# EAGLE board counter - Copia (EAGLE 9.0.0)
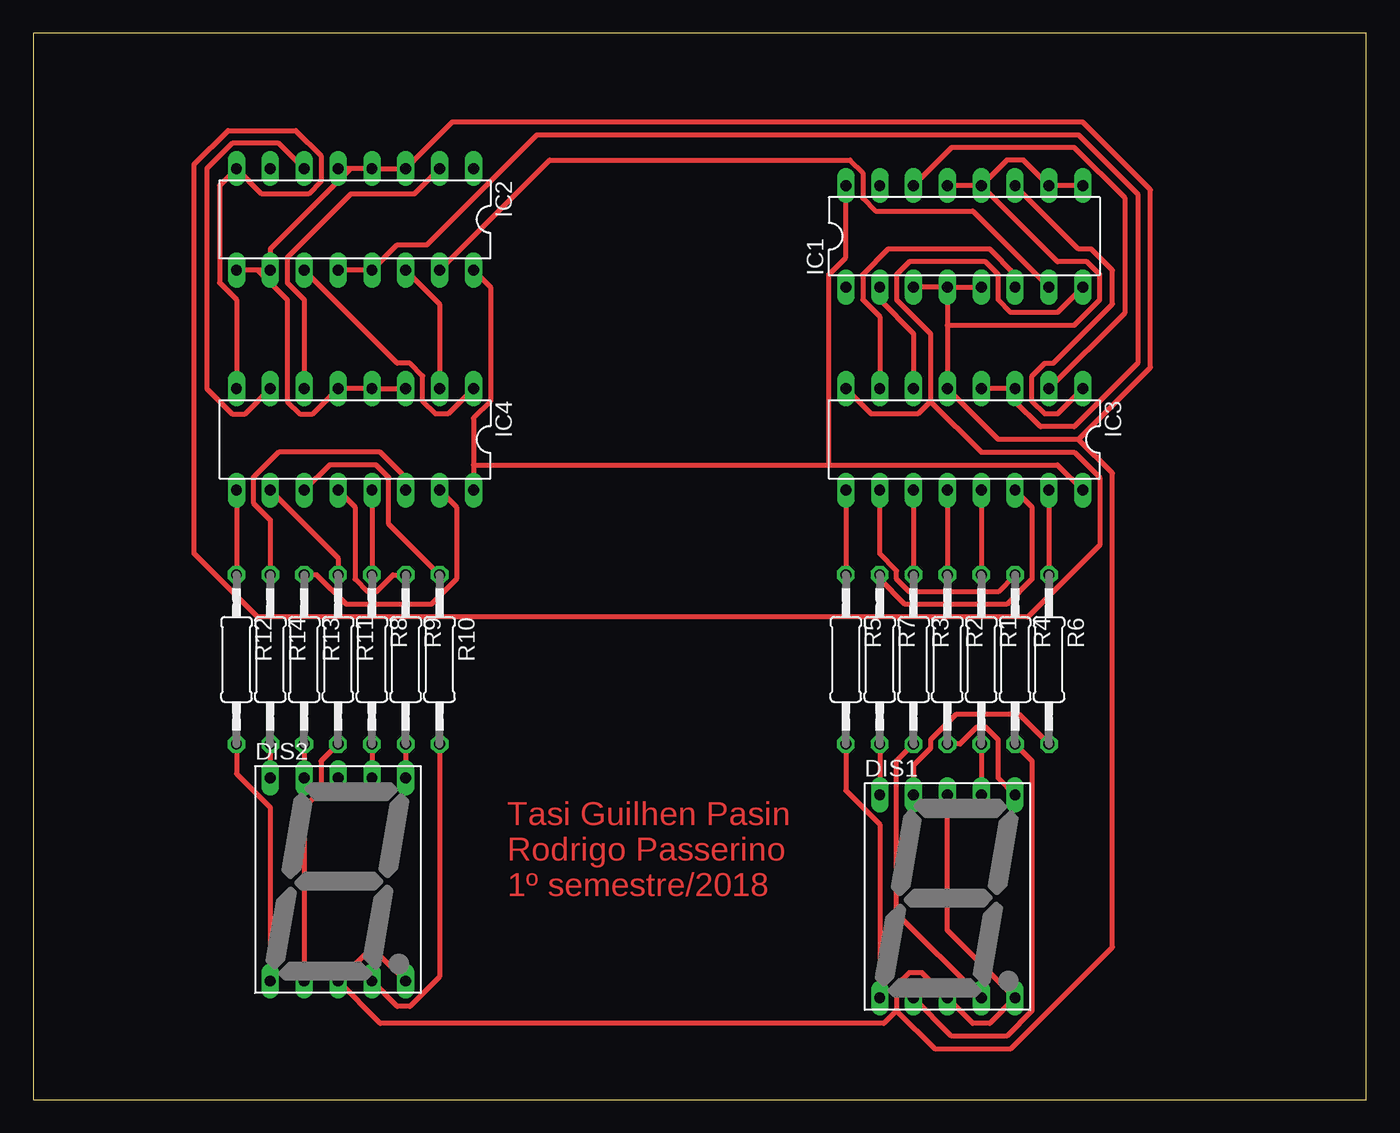
[diagram p0: board, top side]
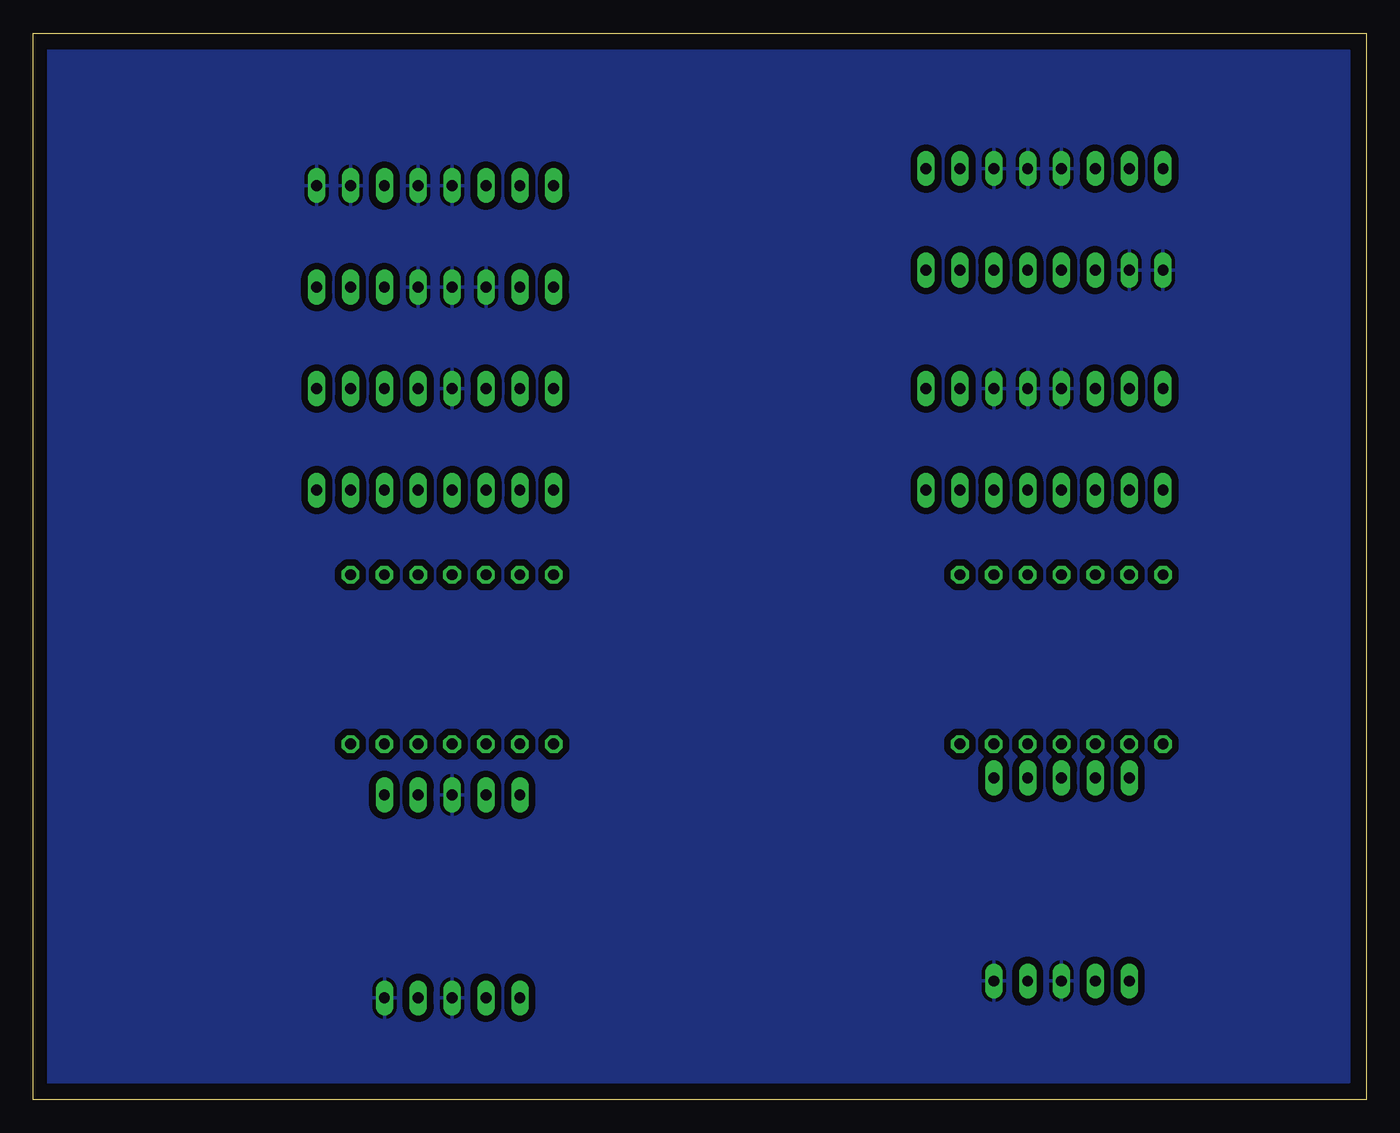
[diagram p1: board, bottom side, seen from below]

Size 100 x 80 mm. Coordinates in mm from the lower left corner, seen from the top.
Outline: 0,0 100,0 100,80 0,80 0,0
Copper layers (1*16): Top 0.035mm / dielectric 1.5mm / Bottom 0.035mm
Design rules "default *": minimum track width 15mil, minimum drill 0.35mm, track to track 20mil, track to pad 6mil, pad to pad 6mil, via to via 6mil, smd to smd 6mil, copper to edge 40mil, drill to drill 6mil, minimum pad ring 10mil, minimum via ring 8mil, stop-mask expansion 4mil, vias tented up to drill 0mil, thermal gap 10mil
Net classes: 0 default: clearance 0.205 mm

## Footprints (pad centres in the part's own frame; a part is rotated, then mirrored left to right if it is on the bottom)
HDSP-M = drill 0.813 long: 1 -5.08,-7.62; 2 -2.54,-7.62; 3 0,-7.62; 4 2.54,-7.62; 5 5.08,-7.62; 6 5.08,7.62; 7 2.54,7.62; 8 0,7.62; 9 -2.54,7.62; 10 -5.08,7.62
DIL16 = drill 0.813 long: 1 -8.89,-3.81; 2 -6.35,-3.81; 3 -3.81,-3.81; 4 -1.27,-3.81; 5 1.27,-3.81; 6 3.81,-3.81; 7 6.35,-3.81; 8 8.89,-3.81; 9 8.89,3.81; 10 6.35,3.81; 11 3.81,3.81; 12 1.27,3.81; 13 -1.27,3.81; 14 -3.81,3.81; 15 -6.35,3.81; 16 -8.89,3.81
0207/12 = drill 0.813 octagon: 1 -6.35,0; 2 6.35,0

## Placement (x,y rotation side)
DIS1  HD-H101  [HDSP-M]  68.58,15.24 0 top
DIS2  HD-H101  [HDSP-M]  22.86,16.51 0 top
IC1  4510N  [DIL16]  69.85,64.77 0 top
IC2  4510N  [DIL16]  24.13,66.04 180 top
IC3  4511N  [DIL16]  69.85,49.53 180 top
IC4  4511N  [DIL16]  24.13,49.53 180 top
R1  [0207/12]  71.12,33.02 270 top
R2  [0207/12]  68.58,33.02 270 top
R3  [0207/12]  66.04,33.02 270 top
R4  [0207/12]  73.66,33.02 270 top
R5  [0207/12]  60.96,33.02 270 top
R6  [0207/12]  76.2,33.02 270 top
R7  [0207/12]  63.5,33.02 270 top
R8  [0207/12]  25.4,33.02 270 top
R9  [0207/12]  27.94,33.02 270 top
R10  [0207/12]  30.48,33.02 270 top
R11  [0207/12]  22.86,33.02 270 top
R12  [0207/12]  15.24,33.02 270 top
R13  [0207/12]  20.32,33.02 270 top
R14  [0207/12]  17.78,33.02 270 top

## Library data of the parts
DIS1 DIS2 = display-hp; OC_FARNELL: unknown; OC_NEWARK: unknown
IC1-IC4 = 45xx
R1-R14 = resistor

## Nets
CLK: IC1.15
CLK2: IC1.7 IC2.15
DIG_AA: IC3.13 R1.1
DIG_AB: IC3.12 R2.1
DIG_AC: IC3.11 R3.1
DIG_AD: IC3.10 R4.1
DIG_AE: IC3.9 R5.1
DIG_AF: IC3.15 R6.1
DIG_AG: IC3.14 R7.1
GND: DIS1.3 DIS1.5 DIS1.8 DIS2.3 DIS2.5 IC1.3 IC1.4 IC1.5 IC1.9 IC1.10 IC1.12 IC1.13 IC2.3 IC2.4 IC2.5 IC2.9 IC2.10 IC3.5 IC4.3 IC4.4 IC4.5
N$2: IC1.6 IC3.7
N$3: IC1.11 IC3.1
N$4: IC1.14 IC3.2
N$5: IC1.2 IC3.6
N$6: DIS1.7 R1.2
N$7: DIS1.6 R2.2
N$8: DIS1.4 R3.2
N$9: DIS1.2 R4.2
N$10: DIS1.1 R5.2
N$11: DIS1.9 R6.2
N$12: DIS1.10 R7.2
N$13: DIS2.7 R8.2
N$14: DIS2.6 R9.2
N$15: DIS2.4 R10.2
N$16: DIS2.2 R11.2
N$17: DIS2.1 R12.2
N$18: DIS2.9 R13.2
N$19: DIS2.10 R14.2
N$20: IC2.6 IC4.7
N$21: IC2.11 IC4.1
N$22: IC2.14 IC4.2
N$23: IC2.2 IC4.6
N$24: IC4.13 R8.1
N$25: IC4.12 R9.1
N$26: IC4.11 R10.1
N$27: IC4.10 R11.1
N$28: IC4.9 R12.1
N$29: IC4.15 R13.1
N$30: IC4.14 R14.1
N$31: DIS2.8
VCC: IC2.12 IC2.13 IC3.3 IC3.4
VDD: IC1.16 IC2.16 IC3.16 IC4.16
VSS: IC1.8 IC2.8 IC3.8 IC4.8

## Tracks (layer width: path | path; a pad name or v marks a point on that pad's centre or on a via)
CLK2
  Top 0.381: IC1.7 70.48,66.67 63.18,66.67 62.23,67.63 62.23,69.53 61.28,70.48 38.73,70.48 IC2.15
DIG_AA
  Top 0.381: IC3.13 R1.1
DIG_AB
  Top 0.381: IC3.12 R2.1
DIG_AC
  Top 0.381: IC3.11 R3.1
DIG_AD
  Top 0.381: IC3.10 63.5,40.96 64.77,39.69 64.77,39.05 65.72,38.1 72.39,38.1 R4.1
DIG_AE
  Top 0.381: IC3.9 R5.1
DIG_AF
  Top 0.381: IC3.15 R6.1
DIG_AG
  Top 0.381: R7.1 63.5,39.05 65.41,37.15 73.03,37.15 74.93,39.05 74.93,44.45 IC3.14
GND
  Top 0.381: IC4.3 IC4.4 IC4.5 20.95,51.44 20,51.44 19.05,52.39 19.05,60.01 16.83,62.23 | 16.83,62.23 IC2.10 17.78,63.82 23.81,69.85 | 16.83,62.23 IC2.9 | 23.81,69.85 IC2.4 IC2.3 31.43,73.34 78.74,73.34 83.82,68.26 83.82,54.93 78.42,49.53 | 23.81,69.85 IC2.5 | IC1.12 IC1.13 | IC1.9 IC1.10 74.3,70.48 73.03,70.48 IC1.12 | IC1.4 IC1.3 | IC1.4 68.58,58.1 | 68.58,58.1 IC3.5 72.39,49.53 78.42,49.53 | IC1.4 IC1.5 | IC1.12 76.83,62.87 79.06,62.87 80.01,61.91 80.01,60.01 78.11,58.1 68.58,58.1 | DIS2.5 26.04,10.79 24.77,10.79 DIS2.3 26.04,5.71 63.82,5.71 64.77,6.67 | DIS1.8 68.58,12.7 DIS1.5 71.75,5.71 70.48,5.71 DIS1.3 66.67,9.53 65.72,9.53 64.77,8.57 64.77,6.67 | 78.42,49.53 80.96,46.99 80.96,11.43 73.34,3.81 67.63,3.81 64.77,6.67
  pour Bottom: 1.27,78.74 1.27,1.27 99.06,1.27 99.06,78.74
N$2
  Top 0.381: IC3.7 63.5,58.74 62.23,60.01 62.23,61.91 64.14,63.82 71.75,63.82 73.66,61.91 IC1.6
N$3
  Top 0.381: IC1.11 78.42,63.82 79.38,63.82 80.96,62.23 80.96,59.69 76.52,55.24 75.88,55.24 74.93,54.29 74.93,52.39 75.88,51.44 76.83,51.44 IC3.1
N$4
  Top 0.381: IC1.14 68.9,71.44 78.11,71.44 81.92,67.63 81.92,59.05 IC3.2
N$5
  Top 0.381: IC3.6 66.04,57.47 63.5,60.01 IC1.2
N$6
  Top 0.381: R1.2 DIS1.7
N$7
  Top 0.381: R2.2 69.53,26.67 70.8,27.94 71.44,27.94 72.39,26.99 72.39,24.13 DIS1.6
N$8
  Top 0.381: R3.2 64.77,25.4 64.77,13.97 DIS1.4
N$9
  Top 0.381: DIS1.2 68.9,4.76 73.03,4.76 74.93,6.67 74.93,25.4 R4.2
N$10
  Top 0.381: DIS1.1 63.5,20.64 60.96,23.18 R5.2
N$11
  Top 0.381: DIS1.9 66.04,25.08 67.31,26.35 67.31,26.99 69.22,28.89 73.98,28.89 R6.2
N$12
  Top 0.381: R7.2 DIS1.10
N$13
  Top 0.381: R8.2 DIS2.7
N$14
  Top 0.381: R9.2 DIS2.6
N$15
  Top 0.381: DIS2.4 27.3,6.99 28.26,6.99 30.48,9.21 R10.2
N$16
  Top 0.381: DIS2.2 20.32,21.91 21.59,23.18 21.59,25.4 R11.2
N$17
  Top 0.381: DIS2.1 17.78,21.91 15.24,24.45 R12.2
N$18
  Top 0.381: R13.2 DIS2.9
N$19
  Top 0.381: R14.2 DIS2.10
N$20
  Top 0.381: IC4.7 15.88,51.44 14.92,51.44 13.02,53.34 13.02,69.85 14.92,71.75 18.41,71.75 IC2.6
N$21
  Top 0.381: IC2.11 27.3,55.24 28.26,55.24 29.21,54.29 29.21,52.39 30.16,51.44 31.11,51.44 IC4.1
N$22
  Top 0.381: IC4.2 30.48,59.69 IC2.14
N$23
  Top 0.381: IC4.6 20.32,60.01 19.05,61.28 19.05,63.18 23.81,67.94 28.57,67.94 IC2.2
N$24
  Top 0.381: IC4.13 R8.1
N$25
  Top 0.381: R9.1 26.99,39.37 25.72,38.1 25.08,38.1 24.13,39.05 24.13,44.45 IC4.12
N$26
  Top 0.381: IC4.11 22.23,47.62 25.72,47.62 26.67,46.67 26.67,43.18 R10.1
N$27
  Top 0.381: R11.1 22.86,40.64 IC4.10
N$28
  Top 0.381: IC4.9 R12.1
N$29
  Top 0.381: R13.1 21.27,39.37 23.5,37.15 29.84,37.15 31.75,39.05 31.75,44.45 IC4.15
N$30
  Top 0.381: R14.1 17.78,43.5 16.51,44.77 16.51,46.67 18.41,48.58 26.04,48.58 27.94,46.67 IC4.14
VCC
  Top 0.381: IC3.4 IC3.3 73.66,52.39 75.56,50.48 78.11,50.48 82.87,55.24 82.87,67.94 78.42,72.39 37.78,72.39 29.53,64.14 27.3,64.14 IC2.13 IC2.12
VDD
  Top 0.381: 33.02,47.62 33.02,51.12 34.29,52.39 34.29,60.96 IC2.16 | 33.02,47.62 IC4.16 | IC3.16 76.83,47.62 59.69,47.62 | 33.02,47.62 59.69,47.62 | IC1.16 60.96,63.18 59.69,61.91 59.69,47.62
VSS
  Top 0.381: IC4.8 15.24,60.01 13.97,61.28 13.97,68.58 IC2.8 17.14,67.94 20.64,67.94 21.59,68.9 21.59,70.8 19.68,72.71 14.61,72.71 12.06,70.17 12.06,40.96 16.83,36.2 74.61,36.2 80.01,41.59 80.01,46.67 78.11,48.58 71.12,48.58 67.31,52.39 | IC3.8 62.87,51.44 66.36,51.44 67.31,52.39 | 67.31,52.39 67.31,57.47 64.77,60.01 64.77,61.91 65.72,62.87 71.44,62.87 72.39,61.91 72.39,60.01 73.34,59.05 76.83,59.05 IC1.8

## Text on the board
Top: Tasi Guilhen Pasin / Rodrigo Passerino / 1º semestre/2018